# Altium PCB SFH7072_Breakout.PcbDoc
Units mm, origin at the board's own origin, x right, y up, seen from the top; angles counter-clockwise.
Board outline 15 x 15 mm, 4 copper layers (Top Layer, Internal Plane 1, Internal Plane 2, Bottom Layer), stack 0.778 mm thick; 3 components, 9 nets, 24 pads, 11 vias.
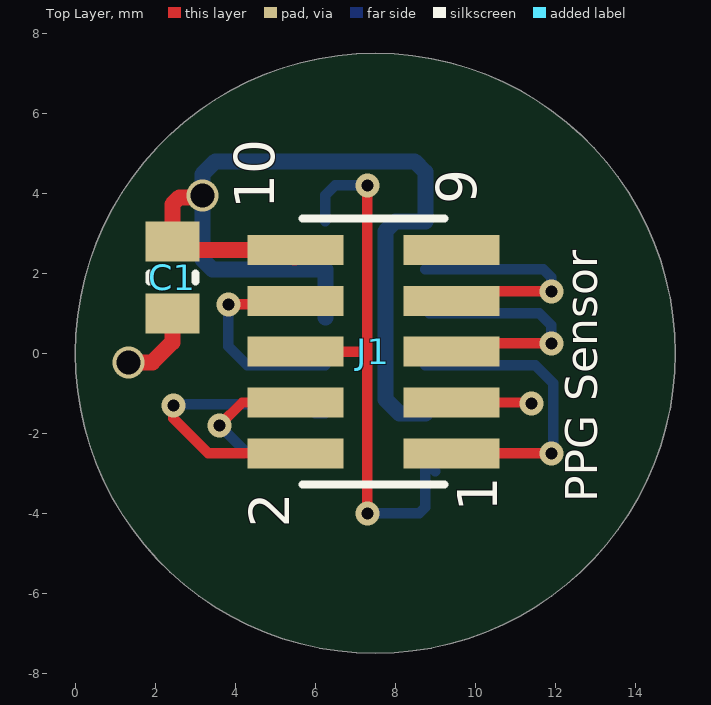
[diagram p0: Top Layer view]
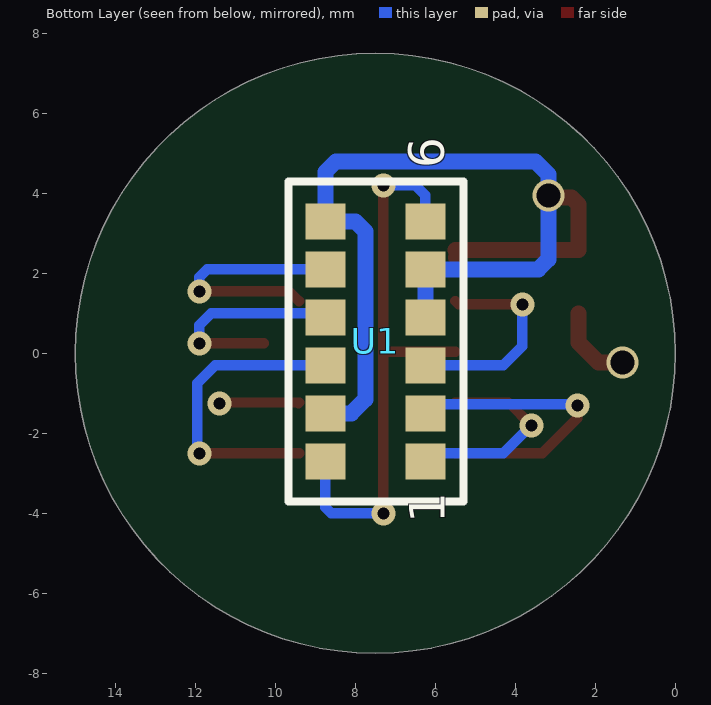
[diagram p1: Bottom Layer view, seen from below]
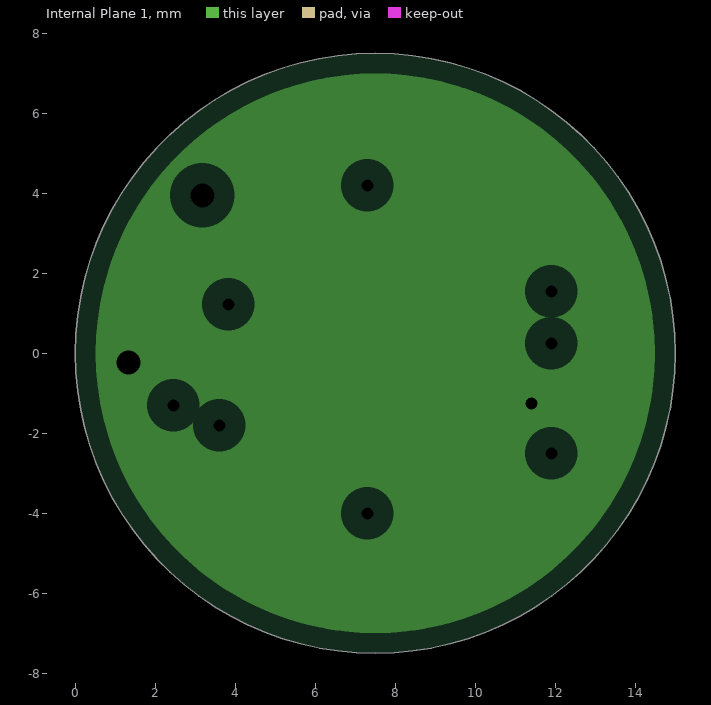
[diagram p2: Internal Plane 1, clearances drawn from the general rule]
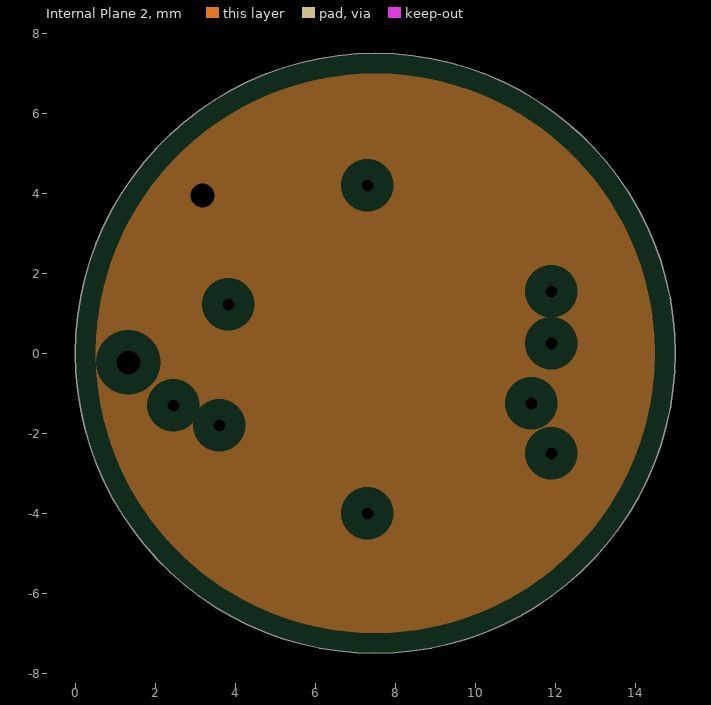
[diagram p3: Internal Plane 2, clearances drawn from the general rule]

## Layer stack, top to bottom
Top Solder: solder mask 0.0102, Solder Resist, Dk 3.5
Top Layer: signal copper 0.0356
Dielectric 1: core 0.254, FR-4, Dk 4.2
Internal Plane 1: plane copper 0.036, net SGND
Dielectric 3: prepreg 0.127, Dk 4.2
Internal Plane 2: plane copper 0.036, net TX_SUP
Dielectric 2: core 0.254, Dk 4.2
Bottom Layer: signal copper 0.0356
Bottom Solder: solder mask 0.0102, Solder Resist, Dk 3.5

## Board outline
7.5,-7.5 cw(c7.5,0) 0,0 cw(c7.5,0) 7.5,7.5 cw(c7.5,0) 15,0 cw(c7.5,0)

## Design rules (kind name [scope] priority, off if disabled: settings)
Clearance Clearance_Via_Via_Same_Net [isVia vs isVia] p1: gap=0.15 ignorepadtopadclearanceinfootprint=FALSE except(0: Arc-Hole Track-Hole SMDPad-Hole THPad-Hole Via-Hole Fill-Hole Poly-Hole Region-Hole Text-Hole)
Clearance Clearance_KeepOut [All vs OnLayer('Keep-Out Layer')] p2 off: gap=1 ignorepadtopadclearanceinfootprint=FALSE except(0: Arc-Hole Track-Hole SMDPad-Hole THPad-Hole Via-Hole Fill-Hole Poly-Hole Region-Hole Text-Hole)
Clearance Clearance_NDK [NOT PadIsPlated] p3: gap=0.5 ignorepadtopadclearanceinfootprint=FALSE except(0: Arc-Hole Track-Hole SMDPad-Hole THPad-Hole Via-Hole Fill-Hole Poly-Hole Region-Hole Text-Hole)
Clearance [All] p4: gap=0.1 ignorepadtopadclearanceinfootprint=FALSE except(0: Arc-Hole Track-Hole SMDPad-Hole THPad-Hole Via-Hole Fill-Hole Poly-Hole Region-Hole Text-Hole)
ComponentClearance [All] p1: gap=0 collisioncheckmode=3 verticalgap=0.254 showdistances=FALSE
FabricationTestPointUsage TestPointUsage [All] p1: valid=0 allowmultiple=FALSE
FabricationTestpoint Testpoint [All] p1: side=3 testpointundercomponent=TRUE minsize=1.016 maxsize=2.54 preferedsize=1.524 minholesize=0 maxholesize=1.016 preferedholesize=0.813 testpointgrid=0.025 allowsidetop=TRUE allowsidebottom=TRUE usegrid=TRUE gridtolerance=0
HoleSize [All] p1: absolutevalues=TRUE maxlimit=6 minlimit=0.3 maxpercent=80.000 minpercent=20.000
MinimumAnnularRing MinimumAnnularRing_Vias [isVia] p1: minimumring=0.1
MinimumAnnularRing [All] p2: minimumring=0.1
MinimumSolderMaskSliver [All] p1: minsoldermaskwidth=0.1
NetAntennae [All] p1 off: netantennaetolerance=0
PlaneClearance [All] p1: clearance=0.508
PlaneConnect PlaneConnect_Vias [isVia] p1: planeconnectstyle=Direct reliefexpansion=0.508 reliefentries=4 reliefconductorwidth=0.254 reliefairgap=0.254
PlaneConnect [All] p2: planeconnectstyle=Direct reliefexpansion=0.508 reliefentries=4 reliefconductorwidth=0.254 reliefairgap=0.254
PolygonConnect PolygonConnect_Vias [isVia] p1: connectstyle=Direct reliefconductorwidth=0.254 reliefentries=4 polygonreliefangle="90 Angle" airgapwidth=0.254
PolygonConnect [All] p2: connectstyle=Direct reliefconductorwidth=0.254 reliefentries=4 polygonreliefangle="90 Angle" airgapwidth=0.254
RoutingVias [All] p1: holewidth=0.5 width=0.8 viastyle="Through Hole" minholewidth=0.3 minwidth=0.5 maxholewidth=0.8 maxwidth=1
SMDEntry [All] p1: side=TRUE corner=TRUE anyangle=TRUE
SMDToCorner [All] p1 off: distance=196850
SilkToSilkClearance [All] p1 off: silktosilkclearance=0.15
SilkToSolderMaskClearance SilkscreenOverComponentPads [IsPad] p1 off: minsilkscreentomaskgap=0.15 clearancetoexposedcopper=FALSE
SolderMaskExpansion [All] p1: expansion=0.05 istentingtop=FALSE
ViasUnderSMD [All] p1: allowed=FALSE
Width [All] p1: maxlimit=10 minlimit=0.15 preferedwidth=0.254 checkconnectedcopper=TRUE
20 further rules are at their usual default settings.

## Components (designator, comment, footprint, x,y, rotation, side; value= is the part's Value field where it differs from the comment)
C1 "33u" CAPC2012X05N 2.425,1.9 r90 top
J1 "1.27 mm_SMD_Vertical_10 pin" 62131021021 7.45,0.04 r90 top
U1 "SFH7072" SFH_7072 7.45,0.275 r90 bottom

## Footprints (in the part's own frame and the unit in brackets; to place one, negate y for a bottom-side part, rotate by r counter-clockwise, add the part's x,y. Pads: shape width x height; smd on the part's side, far side on the other; paste and mask are expansions set on the pad)
62131021021 [mm] "Pin Header, pitch 1.27 mm, SMD, Vertical, dual row, 10p"
  rect 0.75x2.4 smd: 1(-2.54,-1.95) 2(-2.54,1.95) 3(-1.27,-1.95) 4(-1.27,1.95) 5(0,-1.95) 6(0,1.95) 7(1.27,-1.95) 8(1.27,1.95) 9(2.54,-1.95) 10(2.54,1.95)
  silkscreen extent -3.32,-1.78 3.32,1.78, body extent -3.17,-2.55 3.17,2.55, height 5.9
CAPC2012X05N [mm] "Chip Capacitor, 2-Leads, Body 2,00x1,25mm, IPC Medium Density, 0805"
  rect 1x1.35 smd: 1(-0.9,0) 2(0.9,0)
  silkscreen extent -0.1,-0.58 0.1,0.58, body extent -1.05,-0.67 1.05,0.68, height 0.5
SFH_7072 [mm] "BiofySensor, two green emitters, one red emitter, one infrared emitter, two detectors"
  rect 0.9x1 smd: 1(-2.975,-1.2) 2(-1.775,-1.2) 3(-0.575,-1.2) 4(0.625,-1.2) 5(1.825,-1.2) 6(3.025,-1.2) 7(3.025,1.3) 8(1.825,1.3) 9(0.625,1.3) 10(-0.575,1.3) 11(-1.775,1.3) 12(-2.975,1.3)
  silkscreen extent -3.98,-2.15 4.03,2.22

## Part data
C1: library part C_33u_0805, "Kondensator 10u 0402", Tested=False
J1: library part 62131021021, "Pin Header WR-PHD, pitch 1.27 mm, SMD, Vertical, dual row, 10 pin", Contact Resistance="20 mOhm", Insulation Resistance=">1000 MOhm", Operating Temperature="-40 to 105 degC", Rated Current="1 A", Working Voltage="100 VAC", ComponentLink1Description=Manufacturer, ComponentLink1URL=http://www.we-online.de, ComponentLink2Description=Datasheet, ComponentLink2URL=http://katalog.we-online.de/em/datasheet/62131021021.pdf, Mounting Technology=SMD, Orientation=Vertical, Part Number=62131021021, Pin Number=10, Pitch="1.27 mm", Published Date="Jan. 2018", Publisher="Wurth Elektronik", Row Number=Dual
U1: "BioMon Sensor, SMD", Manufacturer=OSRAM, ComponentLink1Description="Datasheet URL", ComponentLink1URL="https://sps06.itg.ti.com/sites/KMS/crossdivteams/altium/docs/ComponentDatasheets/SFH 7072.pdf", LatestRevisionDate=2016-06-03, MountType=SMT, PackageReference=7.5x3.9mm, PartNumber=SFH7072, Publisher="Texas Instruments", RoHS=Y, SizeArea_mm2=29.25, SizeAreaWB_mm2=56.05, SizeX_mm=3.9, SizeY_mm=7.5, SizeZ_mm=1, SymbolCreator=Altium, SymbolVersion=2016-05-27

## Via types
v1: diameter 0.6, hole 0.3, Top Layer to Bottom Layer, tented both sides, 9 vias
v2: diameter 0.8, hole 0.6, Top Layer to Bottom Layer, tented both sides, 2 vias

## Nets (pads, with @x,y where several pads share a name; then routed paths per layer and width w, separated by ;. In a path a pad name is that pad's centre, name@x,y a point inside that pad or via, vN(x,y) a via of type N, cw(c..) or ccw(c..) an arc to the next point about the centre after c; other vN are vias at no path point)
PD1_A: J1.2 U1.2 | length 7.9
  Top Layer w0.254: v1(2.45,-1.3) 2.45,-1.625 3.325,-2.5 J1.2
  Bottom Layer w0.254: v1(2.45,-1.3) 2.477,-1.273 6.023,-1.273 U1.2 U1.2@6,-1.5
PD1_C: J1.4 U1.1 | length 5.2
  Top Layer w0.254: v1(3.6,-1.8) 4.17,-1.23 J1.4
  Bottom Layer w0.254: v1(3.6,-1.8) 4.3,-2.5 6.05,-2.5 U1.1
PD2_A: J1.1 U1.10 | length 7.7
  Top Layer w0.254: J1.1 v1(11.9,-2.5)
  Bottom Layer w0.254: U1.10 11.5,-0.3 11.95,-0.75 11.95,-2.35 v1@11.8,-2.5
PD2_C: J1.8 U1.3 | length 5.4
  Top Layer w0.254: v1(3.825,1.225) 5.415,1.225 J1.8
  Bottom Layer w0.254: v1(3.825,1.225) 3.825,0.175 4.3,-0.3 U1.3
SGND: C1.1 J1.3 | length 4
  Top Layer w0.254: J1.3@9.42,-1.25 J1.3 v1@11.355,-1.23
  Top Layer w0.4: v2(1.325,-0.225) 1.925,-0.225 2.425,0.275 C1.1
  other v1: 11.4,-1.25
TX1: J1.6 U1.6 U1.12 | length 15.1
  Top Layer w0.254: J1.6 7.26,0.04 7.3,0 ; v1(7.3,-4) 7.3,0 ; v1(7.3,4.2) 7.3,0
  Bottom Layer w0.254: U1.6 6.25,3.95 6.5,4.2 v1(7.3,4.2) ; v1(7.3,-4) 8.6,-4 8.75,-3.85 U1.12 ; U1.12@8.95,-2.5 U1.12 ; U1.12@9,-2.95 U1.12
TX2: J1.7 U1.8 | length 6.2
  Top Layer w0.254: J1.7 9.41,1.3 9.66,1.55 v1(11.9,1.55)
  Bottom Layer w0.254: U1.8 11.7,2.1 11.9,1.9 v1(11.9,1.55) v1@11.9,1.5
TX3: J1.5 U1.9 | length 5.2
  Top Layer w0.254: J1.5@10.29,0.25 v1(11.9,0.25)
  Bottom Layer w0.254: U1.9@8.85,1 11.6,1 11.9,0.7 v1(11.9,0.25)
TX_SUP: C1.2 J1.10 U1.4 U1.5 U1.7 U1.11 | length 25.5
  Top Layer w0.254: J1.10@5.48,2.4 5.5,2.38 J1.10
  Top Layer w0.4: v2@3.18,3.755 3.035,3.9 2.6,3.9 2.425,3.725 C1.2 2.425,2.58 J1.10 ; J1.10@5.4,2.48 J1.10@5.48,2.4
  Bottom Layer w0.4: U1.4 U1.5 3.425,2.1 3.175,2.35 v2(3.175,3.95) 3.175,4.475 3.5,4.8 8.483,4.8 8.75,4.533 U1.7 8,3.3 7.75,3.05 7.75,-1.15 8.1,-1.5 U1.11
pads on no net: J1.9

## Polygon pours and split planes (outlines as drawn)
SGND on Internal Plane 1 (split plane): 7.866,6.982 8.231,6.954 8.594,6.906 8.954,6.839 9.31,6.754 9.661,6.65 10.006,6.527 10.344,6.387 10.674,6.23 10.996,6.055 11.308,5.864 11.61,5.657 11.9,5.434 12.178,5.196 12.444,4.944 12.696,4.678 12.934,4.4 13.157,4.11 13.364,3.808 13.555,3.496 13.73,3.174 13.887,2.844 14.027,2.506 14.15,2.161 14.254,1.81 14.339,1.454 14.406,1.094 14.454,0.731 14.482,0.366 14.491,0.019 14.49,0 14.491,-0.019 14.482,-0.366 14.454,-0.731 14.406,-1.094 14.339,-1.454 14.254,-1.81 14.15,-2.161 14.027,-2.506 13.887,-2.844 13.73,-3.174 13.555,-3.496 13.364,-3.808 13.157,-4.11 12.934,-4.4 12.696,-4.678 12.444,-4.944 12.178,-5.196 11.9,-5.434 11.61,-5.657 11.308,-5.864 10.996,-6.055 10.674,-6.23 10.344,-6.387 10.006,-6.527 9.661,-6.65 9.31,-6.754 8.954,-6.839 8.594,-6.906 8.231,-6.954 7.866,-6.982 7.519,-6.991 7.5,-6.99 7.481,-6.991 7.134,-6.982 6.769,-6.954 6.406,-6.906 6.046,-6.839 5.69,-6.754 5.339,-6.65 4.994,-6.527 4.656,-6.387 4.326,-6.23 4.004,-6.055 3.692,-5.864 3.39,-5.657 3.1,-5.434 2.822,-5.196 2.556,-4.944 2.304,-4.678 2.066,-4.4 1.843,-4.11 1.636,-3.808 1.445,-3.496 1.27,-3.174 1.113,-2.844 0.973,-2.506 0.85,-2.161 0.746,-1.81 0.661,-1.454 0.594,-1.094 0.546,-0.731 0.518,-0.366 0.509,-0.019 0.51,0 0.509,0.019 0.518,0.366 0.546,0.731 0.594,1.094 0.661,1.454 0.746,1.81 0.85,2.161 0.973,2.506 1.113,2.844 1.27,3.174 1.445,3.496 1.636,3.808 1.843,4.11 2.066,4.4 2.304,4.678 2.556,4.944 2.822,5.196 3.1,5.434 3.39,5.657 3.692,5.864 4.004,6.055 4.326,6.23 4.656,6.387 4.994,6.527 5.339,6.65 5.69,6.754 6.046,6.839 6.406,6.906 6.769,6.954 7.134,6.982 7.481,6.991 7.5,6.99 7.519,6.991
TX_SUP on Internal Plane 2 (split plane): 7.866,6.982 8.231,6.954 8.594,6.906 8.954,6.839 9.31,6.754 9.661,6.65 10.006,6.527 10.344,6.387 10.674,6.23 10.996,6.055 11.308,5.864 11.61,5.657 11.9,5.434 12.178,5.196 12.444,4.944 12.696,4.678 12.934,4.4 13.157,4.11 13.364,3.808 13.555,3.496 13.73,3.174 13.887,2.844 14.027,2.506 14.15,2.161 14.254,1.81 14.339,1.454 14.406,1.094 14.454,0.731 14.482,0.366 14.491,0.019 14.49,0 14.491,-0.019 14.482,-0.366 14.454,-0.731 14.406,-1.094 14.339,-1.454 14.254,-1.81 14.15,-2.161 14.027,-2.506 13.887,-2.844 13.73,-3.174 13.555,-3.496 13.364,-3.808 13.157,-4.11 12.934,-4.4 12.696,-4.678 12.444,-4.944 12.178,-5.196 11.9,-5.434 11.61,-5.657 11.308,-5.864 10.996,-6.055 10.674,-6.23 10.344,-6.387 10.006,-6.527 9.661,-6.65 9.31,-6.754 8.954,-6.839 8.594,-6.906 8.231,-6.954 7.866,-6.982 7.519,-6.991 7.5,-6.99 7.481,-6.991 7.134,-6.982 6.769,-6.954 6.406,-6.906 6.046,-6.839 5.69,-6.754 5.339,-6.65 4.994,-6.527 4.656,-6.387 4.326,-6.23 4.004,-6.055 3.692,-5.864 3.39,-5.657 3.1,-5.434 2.822,-5.196 2.556,-4.944 2.304,-4.678 2.066,-4.4 1.843,-4.11 1.636,-3.808 1.445,-3.496 1.27,-3.174 1.113,-2.844 0.973,-2.506 0.85,-2.161 0.746,-1.81 0.661,-1.454 0.594,-1.094 0.546,-0.731 0.518,-0.366 0.509,-0.019 0.51,0 0.509,0.019 0.518,0.366 0.546,0.731 0.594,1.094 0.661,1.454 0.746,1.81 0.85,2.161 0.973,2.506 1.113,2.844 1.27,3.174 1.445,3.496 1.636,3.808 1.843,4.11 2.066,4.4 2.304,4.678 2.556,4.944 2.822,5.196 3.1,5.434 3.39,5.657 3.692,5.864 4.004,6.055 4.326,6.23 4.656,6.387 4.994,6.527 5.339,6.65 5.69,6.754 6.046,6.839 6.406,6.906 6.769,6.954 7.134,6.982 7.481,6.991 7.5,6.99 7.519,6.991

## Silkscreen, mask and mechanical layers (free items; w line width, h text height)
Top Overlay:
  text "PPG Sensor" at 13.05,-3.725 h0.8 r90
Mechanical 1:
  circle w0.1: c7.5,0 r7.5

## Text inside footprints (layer, text, board x,y; h text height)
J1: Top Overlay "1" at 10.55,-3.965 h1 r90; Top Overlay "2" at 5.35,-4.365 h1 r90; Top Overlay "9" at 10.025,3.725 h1 r90; Top Overlay "10" at 4.975,3.6 h1 r90
U1: Bottom Overlay "1" at 5.763,-4.252 h0.89 r270; Bottom Overlay "6" at 5.775,4.625 h0.89 r270